# Altium PCB KUOZHAN.PCBDOC (part 8 of 21)
Units mm, origin at the board's own origin, x right, y up, seen from the top; angles counter-clockwise.
Board outline 165.51 x 116.38 mm, 2 copper layers (Top Layer, Bottom Layer); 171 components, 245 nets, 894 pads, 298 vias.
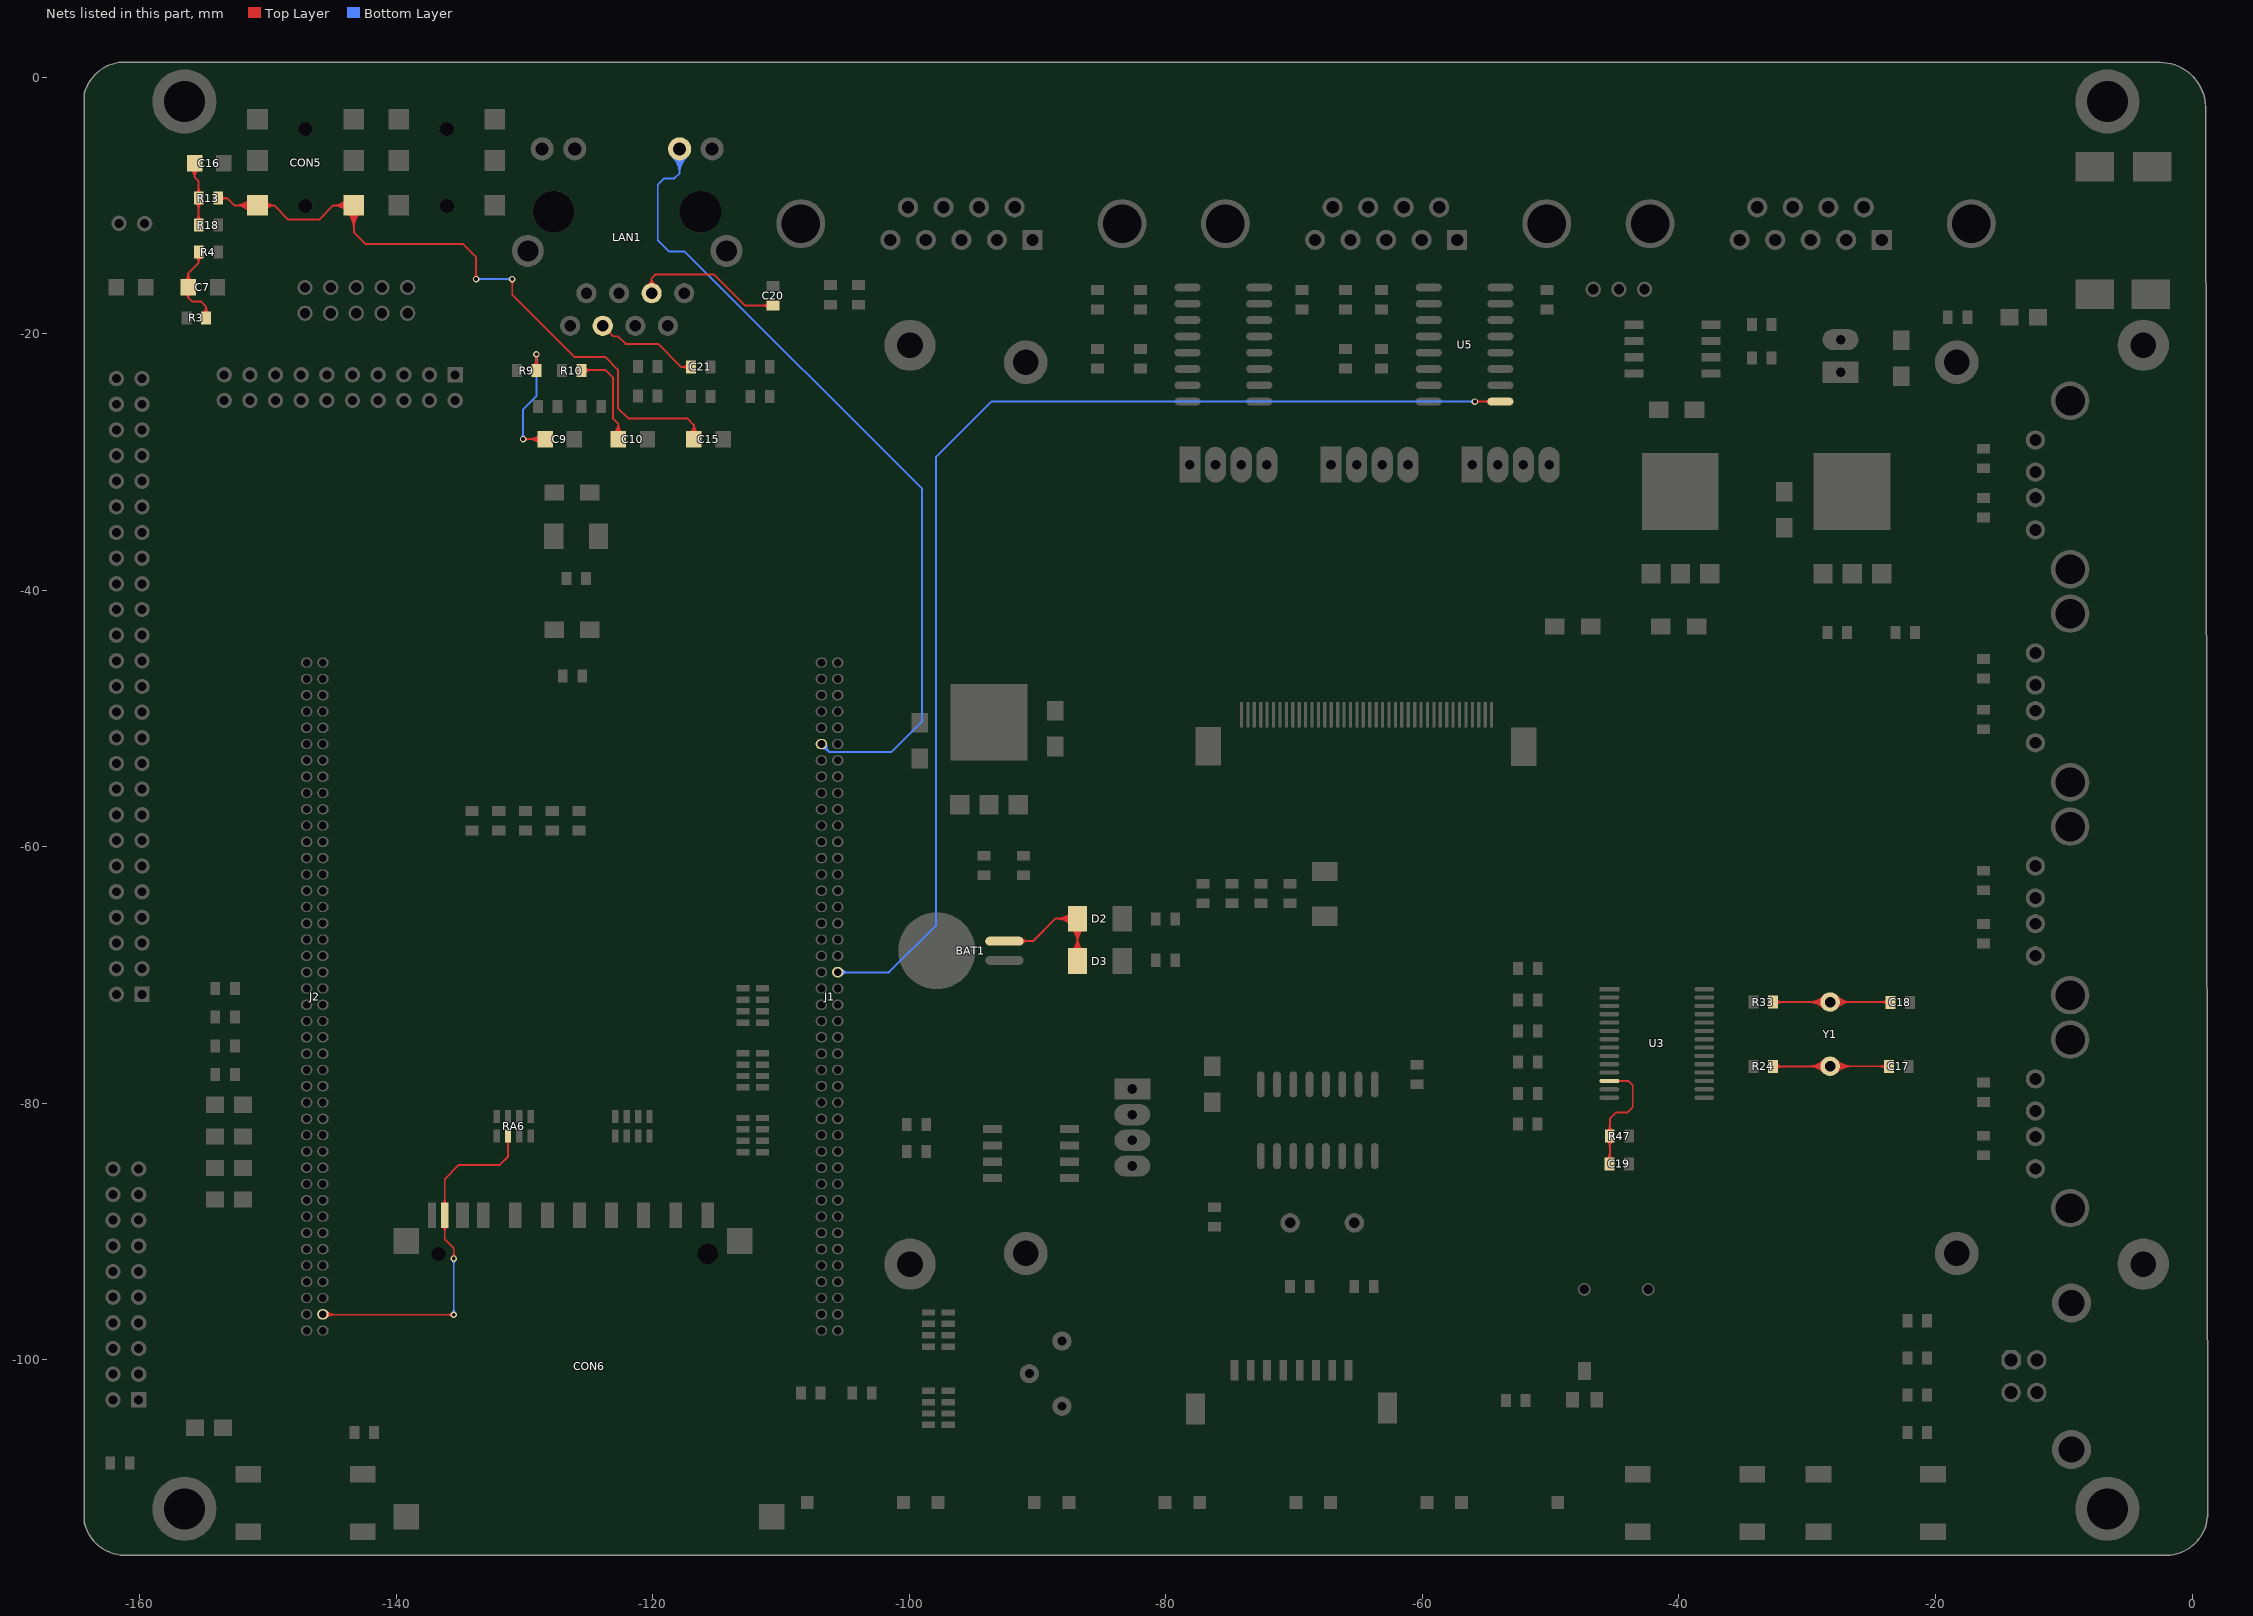
[diagram p8: the nets of this part, all layers, seen from the top]

## Via types
v1: diameter 0.5, hole 0.3, Top Layer to Bottom Layer, 272 vias
v2: diameter 0.6, hole 0.3, Top Layer to Bottom Layer, 24 vias
v3: diameter 0.9, hole 0.9, Top Layer to Bottom Layer, 2 vias

## Nets (pads, with @x,y where several pads share a name; then routed paths per layer and width w, separated by ;. In a path a pad name is that pad's centre, name@x,y a point inside that pad or via, vN(x,y) a via of type N, cw(c..) or ccw(c..) an arc to the next point about the centre after c; other vN are vias at no path point) (continued)
MIC_IN: C15.2 CON5.5 CON5.6 R13.2 | length 103.3
  Top Layer w0.15: R13.2@-153.863,-9.44 -153.16,-9.44 ; CON5.5@-151.313,-10.513 ccw(c-152.55,-11.75) -152.55,-10 ccw(c-152.55,-8.25) CON5.5@-151.313,-9.487 ; CON5.5@-151.207,-10.407 ccw(c-152.188,-11.388) -152.188,-10 ccw(c-152.188,-8.612) CON5.5@-151.207,-9.593 ; CON5.5@-151.101,-10.301 ccw(c-151.826,-11.026) -151.826,-10 ccw(c-151.826,-8.974) CON5.5@-151.101,-9.699 ; CON5.5@-150.311,-10.302 cw(c-149.769,-10.637) -149.769,-10 cw(c-149.769,-9.363) CON5.5@-150.311,-9.698 ; CON5.5@-150.183,-10.381 cw(c-149.5,-10.803) -149.5,-10 ; CON5.5@-150.183,-9.619 ccw(c-149.5,-9.197) -149.5,-10 ; CON5.6@-143.835,-10.48 ccw(c-144.9,-11.421) -144.9,-10 ; CON5.6@-143.835,-9.52 cw(c-144.9,-8.579) -144.9,-10 ; CON5.6@-143.805,-10.513 cw(c-145.042,-11.75) -143.292,-11.75 cw(c-141.542,-11.75) CON5.6@-142.779,-10.513 ; CON5.6@-143.723,-10.381 ccw(c-144.567,-11.127) -144.567,-10 ccw(c-144.567,-8.873) CON5.6@-143.723,-9.619 ; CON5.6@-143.699,-10.407 cw(c-144.68,-11.388) -143.292,-11.388 cw(c-141.904,-11.388) CON5.6@-142.885,-10.407 ; CON5.6@-143.611,-10.281 ccw(c-144.235,-10.833) -144.235,-10 ccw(c-144.235,-9.167) CON5.6@-143.611,-9.719 ; CON5.6@-143.593,-10.301 cw(c-144.318,-11.026) -143.292,-11.026 cw(c-142.266,-11.026) CON5.6@-142.991,-10.301 ; v1@-133.848,-15.652 ccw(c-134.061,-15.439) -133.76,-15.439 ccw(c-133.458,-15.439) v1@-133.671,-15.652 ; v1(-133.76,-15.74) -133.76,-14.04 -134.8,-13 -142.4,-13 -143.292,-12.108 CON5.6@-143.292,-10 -144.9,-10 ; v1@-131.029,-15.829 cw(c-131.242,-16.042) -130.94,-16.042 cw(c-130.639,-16.042) v1@-130.852,-15.829 ; v1(-130.94,-15.74) -130.94,-16.96 -126.1,-21.8 -123.7,-21.8 -122.7,-22.8 -122.7,-25.8 -121.9,-26.6 -117.3,-26.6 -116.782,-27.117 ; C15.2@-116.782,-28.219 -116.782,-27.117 ; R13.2@-153.64,-9.649 cw(c-153.16,-10.097) -153.16,-9.44 ; R13.2@-153.64,-9.649 cw(c-153.16,-10.097) -153.16,-9.44 ; R13.2@-153.64,-9.649 cw(c-153.16,-10.097) -153.16,-9.44 ; R13.2@-153.64,-9.649 cw(c-153.16,-10.097) -153.16,-9.44 ; R13.2@-153.64,-9.649 cw(c-153.16,-10.097) -153.16,-9.44 ; R13.2@-153.64,-9.232 ccw(c-153.16,-8.784) -153.16,-9.44 ; R13.2@-153.64,-9.232 ccw(c-153.16,-8.784) -153.16,-9.44 ; R13.2@-153.64,-9.232 ccw(c-153.16,-8.784) -153.16,-9.44 ; R13.2@-153.64,-9.232 ccw(c-153.16,-8.784) -153.16,-9.44 ; R13.2@-153.64,-9.232 ccw(c-153.16,-8.784) -153.16,-9.44 ; -153.16,-9.44 -152.6,-10 CON5.5@-150.8,-10 -149.5,-10 ; -149.5,-10 -148.4,-11.1 -146,-11.1 -144.9,-10 ; v1@-133.883,-15.617 ccw(c-134.182,-15.318) -133.76,-15.318 ; v1@-133.883,-15.617 ccw(c-134.182,-15.318) -133.76,-15.318 ; v1@-133.883,-15.617 ccw(c-134.182,-15.318) -133.76,-15.318 ; v1@-133.883,-15.617 ccw(c-134.182,-15.318) -133.76,-15.318 ; -133.76,-15.318 ccw(c-133.337,-15.318) v1@-133.636,-15.617 ; -133.76,-15.318 ccw(c-133.337,-15.318) v1@-133.636,-15.617 ; -133.76,-15.318 ccw(c-133.337,-15.318) v1@-133.636,-15.617 ; -133.76,-15.318 ccw(c-133.337,-15.318) v1@-133.636,-15.617 ; v1@-131.064,-15.864 cw(c-131.363,-16.163) -130.94,-16.163 ; v1@-131.064,-15.864 cw(c-131.363,-16.163) -130.94,-16.163 ; v1@-131.064,-15.864 cw(c-131.363,-16.163) -130.94,-16.163 ; v1@-131.064,-15.864 cw(c-131.363,-16.163) -130.94,-16.163 ; -130.94,-16.163 cw(c-130.518,-16.163) v1@-130.817,-15.864 ; -130.94,-16.163 cw(c-130.518,-16.163) v1@-130.817,-15.864 ; -130.94,-16.163 cw(c-130.518,-16.163) v1@-130.817,-15.864 ; -130.94,-16.163 cw(c-130.518,-16.163) v1@-130.817,-15.864 ; C15.2@-117.098,-27.749 ccw(c-117.572,-27.118) -116.782,-27.118 ; C15.2@-117.098,-27.749 ccw(c-117.572,-27.118) -116.782,-27.118 ; C15.2@-117.098,-27.749 ccw(c-117.572,-27.118) -116.782,-27.118 ; C15.2@-117.098,-27.749 ccw(c-117.572,-27.118) -116.782,-27.118 ; C15.2@-117.098,-27.749 ccw(c-117.572,-27.118) -116.782,-27.118 ; C15.2@-117.008,-27.869 ccw(c-117.347,-27.418) -116.782,-27.418 ; C15.2@-117.008,-27.869 ccw(c-117.347,-27.418) -116.782,-27.418 ; C15.2@-117.008,-27.869 ccw(c-117.347,-27.418) -116.782,-27.418 ; C15.2@-117.008,-27.869 ccw(c-117.347,-27.418) -116.782,-27.418 ; C15.2@-117.008,-27.869 ccw(c-117.347,-27.418) -116.782,-27.418 ; -116.782,-27.418 ccw(c-116.218,-27.418) C15.2@-116.557,-27.869 ; -116.782,-27.418 ccw(c-116.218,-27.418) C15.2@-116.557,-27.869 ; -116.782,-27.418 ccw(c-116.218,-27.418) C15.2@-116.557,-27.869 ; -116.782,-27.418 ccw(c-116.218,-27.418) C15.2@-116.557,-27.869 ; -116.782,-27.418 ccw(c-116.218,-27.418) C15.2@-116.557,-27.869 ; -116.782,-27.118 ccw(c-115.993,-27.118) C15.2@-116.467,-27.749 ; -116.782,-27.118 ccw(c-115.993,-27.118) C15.2@-116.467,-27.749 ; -116.782,-27.118 ccw(c-115.993,-27.118) C15.2@-116.467,-27.749 ; -116.782,-27.118 ccw(c-115.993,-27.118) C15.2@-116.467,-27.749 ; -116.782,-27.118 ccw(c-115.993,-27.118) C15.2@-116.467,-27.749
  Bottom Layer w0.15: v1(-133.76,-15.74) v1(-130.94,-15.74) ; v1@-133.671,-15.829 cw(c-133.458,-16.042) -133.458,-15.74 cw(c-133.458,-15.439) v1@-133.671,-15.652 ; v1@-131.029,-15.829 ccw(c-131.242,-16.042) -131.242,-15.74 ccw(c-131.242,-15.439) v1@-131.029,-15.652 ; v1@-133.636,-15.864 cw(c-133.337,-16.163) -133.337,-15.74 ; v1@-133.636,-15.864 cw(c-133.337,-16.163) -133.337,-15.74 ; v1@-133.636,-15.864 cw(c-133.337,-16.163) -133.337,-15.74 ; v1@-133.636,-15.864 cw(c-133.337,-16.163) -133.337,-15.74 ; v1@-133.636,-15.617 ccw(c-133.337,-15.318) -133.337,-15.74 ; v1@-133.636,-15.617 ccw(c-133.337,-15.318) -133.337,-15.74 ; v1@-133.636,-15.617 ccw(c-133.337,-15.318) -133.337,-15.74 ; v1@-133.636,-15.617 ccw(c-133.337,-15.318) -133.337,-15.74 ; -131.363,-15.74 cw(c-131.363,-16.163) v1@-131.064,-15.864 ; -131.363,-15.74 ccw(c-131.363,-15.318) v1@-131.064,-15.617 ; -131.363,-15.74 cw(c-131.363,-16.163) v1@-131.064,-15.864 ; -131.363,-15.74 ccw(c-131.363,-15.318) v1@-131.064,-15.617 ; -131.363,-15.74 cw(c-131.363,-16.163) v1@-131.064,-15.864 ; -131.363,-15.74 ccw(c-131.363,-15.318) v1@-131.064,-15.617 ; -131.363,-15.74 ccw(c-131.363,-15.318) v1@-131.064,-15.617 ; -131.363,-15.74 cw(c-131.363,-16.163) v1@-131.064,-15.864
NCD_SD: CON6.11 J2.82 RA6.6 | length 61.7
  Top Layer w0.15: J2.82@-145.703,-96.474 v1(-135.5,-96.474) ; v1@-135.588,-96.562 ccw(c-135.802,-96.775) -135.802,-96.474 ccw(c-135.802,-96.172) v1@-135.588,-96.385 ; v1@-135.588,-92.012 ccw(c-135.802,-91.798) -135.5,-91.798 ccw(c-135.198,-91.798) v1@-135.412,-92.012 ; v1(-135.5,-92.1) -135.5,-91.3 -136.203,-90.597 CON6.11@-136.203,-88.729 -136.203,-85.903 -135.1,-84.8 -131.9,-84.8 -131.274,-84.174 RA6.6@-131.274,-82.544 ; J2.82@-145.579,-96.597 cw(c-145.28,-96.896) J2.82@-145.28,-96.474 ; J2.82@-145.579,-96.597 cw(c-145.28,-96.896) J2.82@-145.28,-96.474 ; J2.82@-145.579,-96.597 cw(c-145.28,-96.896) J2.82@-145.28,-96.474 ; J2.82@-145.579,-96.35 ccw(c-145.28,-96.051) J2.82@-145.28,-96.474 ; J2.82@-145.579,-96.35 ccw(c-145.28,-96.051) J2.82@-145.28,-96.474 ; J2.82@-145.579,-96.35 ccw(c-145.28,-96.051) J2.82@-145.28,-96.474 ; J2.82@-145.473,-96.703 cw(c-144.918,-97.258) -144.918,-96.474 ; J2.82@-145.473,-96.703 cw(c-144.918,-97.258) -144.918,-96.474 ; J2.82@-145.473,-96.703 cw(c-144.918,-97.258) -144.918,-96.474 ; J2.82@-145.473,-96.244 ccw(c-144.918,-95.689) -144.918,-96.474 ; J2.82@-145.473,-96.244 ccw(c-144.918,-95.689) -144.918,-96.474 ; J2.82@-145.473,-96.244 ccw(c-144.918,-95.689) -144.918,-96.474 ; CON6.11@-136.362,-89.588 cw(c-136.746,-89.972) -136.203,-89.972 ; CON6.11@-136.362,-89.588 cw(c-136.746,-89.972) -136.203,-89.972 ; CON6.11@-136.362,-89.588 cw(c-136.746,-89.972) -136.203,-89.972 ; CON6.11@-136.362,-89.588 cw(c-136.746,-89.972) -136.203,-89.972 ; CON6.11@-136.362,-89.588 cw(c-136.746,-89.972) -136.203,-89.972 ; CON6.11@-136.362,-87.87 ccw(c-136.746,-87.485) -136.203,-87.485 ; CON6.11@-136.362,-87.87 ccw(c-136.746,-87.485) -136.203,-87.485 ; CON6.11@-136.362,-87.87 ccw(c-136.746,-87.485) -136.203,-87.485 ; CON6.11@-136.362,-87.87 ccw(c-136.746,-87.485) -136.203,-87.485 ; CON6.11@-136.362,-87.87 ccw(c-136.746,-87.485) -136.203,-87.485 ; -136.203,-89.972 cw(c-135.66,-89.972) CON6.11@-136.044,-89.588 ; -136.203,-89.972 cw(c-135.66,-89.972) CON6.11@-136.044,-89.588 ; -136.203,-89.972 cw(c-135.66,-89.972) CON6.11@-136.044,-89.588 ; -136.203,-89.972 cw(c-135.66,-89.972) CON6.11@-136.044,-89.588 ; -136.203,-89.972 cw(c-135.66,-89.972) CON6.11@-136.044,-89.588 ; -136.203,-87.485 ccw(c-135.66,-87.485) CON6.11@-136.044,-87.87 ; -136.203,-87.485 ccw(c-135.66,-87.485) CON6.11@-136.044,-87.87 ; -136.203,-87.485 ccw(c-135.66,-87.485) CON6.11@-136.044,-87.87 ; -136.203,-87.485 ccw(c-135.66,-87.485) CON6.11@-136.044,-87.87 ; -136.203,-87.485 ccw(c-135.66,-87.485) CON6.11@-136.044,-87.87 ; -135.922,-96.474 cw(c-135.922,-96.896) v1@-135.624,-96.597 ; -135.922,-96.474 ccw(c-135.922,-96.051) v1@-135.624,-96.35 ; -135.922,-96.474 cw(c-135.922,-96.896) v1@-135.624,-96.597 ; -135.922,-96.474 ccw(c-135.922,-96.051) v1@-135.624,-96.35 ; -135.922,-96.474 cw(c-135.922,-96.896) v1@-135.624,-96.597 ; -135.922,-96.474 ccw(c-135.922,-96.051) v1@-135.624,-96.35 ; -135.922,-96.474 ccw(c-135.922,-96.051) v1@-135.624,-96.35 ; -135.922,-96.474 cw(c-135.922,-96.896) v1@-135.624,-96.597 ; v1@-135.624,-91.976 ccw(c-135.922,-91.678) -135.5,-91.678 ; v1@-135.624,-91.976 ccw(c-135.922,-91.678) -135.5,-91.678 ; v1@-135.624,-91.976 ccw(c-135.922,-91.678) -135.5,-91.678 ; v1@-135.624,-91.976 ccw(c-135.922,-91.678) -135.5,-91.678 ; -135.5,-91.678 ccw(c-135.078,-91.678) v1@-135.376,-91.976 ; -135.5,-91.678 ccw(c-135.078,-91.678) v1@-135.376,-91.976 ; -135.5,-91.678 ccw(c-135.078,-91.678) v1@-135.376,-91.976 ; -135.5,-91.678 ccw(c-135.078,-91.678) v1@-135.376,-91.976 ; RA6.6@-131.398,-82.925 cw(c-131.697,-83.224) -131.274,-83.224 ; RA6.6@-131.398,-82.925 cw(c-131.697,-83.224) -131.274,-83.224 ; RA6.6@-131.398,-82.925 cw(c-131.697,-83.224) -131.274,-83.224 ; RA6.6@-131.398,-82.925 cw(c-131.697,-83.224) -131.274,-83.224 ; RA6.6@-131.398,-82.925 cw(c-131.697,-83.224) -131.274,-83.224 ; -131.274,-83.224 cw(c-130.852,-83.224) RA6.6@-131.15,-82.925 ; -131.274,-83.224 cw(c-130.852,-83.224) RA6.6@-131.15,-82.925 ; -131.274,-83.224 cw(c-130.852,-83.224) RA6.6@-131.15,-82.925 ; -131.274,-83.224 cw(c-130.852,-83.224) RA6.6@-131.15,-82.925 ; -131.274,-83.224 cw(c-130.852,-83.224) RA6.6@-131.15,-82.925 ; J2.82@-145.529,-96.316 ccw(c-145.148,-95.934) -145.148,-96.474 cw(c-145.148,-95.934) J2.82@-145.529,-96.316 ; J2.82@-145.423,-96.669 cw(c-144.951,-97.141) -144.951,-96.474 ccw(c-144.951,-97.141) J2.82@-145.423,-96.669 ; J2.82@-145.423,-96.209 ccw(c-144.785,-95.572) -144.785,-96.474 cw(c-144.785,-95.572) J2.82@-145.423,-96.209
  Bottom Layer w0.15: v1@-135.588,-96.385 ccw(c-135.802,-96.172) -135.5,-96.172 ccw(c-135.198,-96.172) v1@-135.412,-96.385 ; v1@-135.588,-92.188 cw(c-135.802,-92.402) -135.5,-92.402 cw(c-135.198,-92.402) v1@-135.412,-92.188 ; v1(-135.5,-96.474) v1(-135.5,-92.1) ; v1@-135.624,-96.35 ccw(c-135.922,-96.051) -135.5,-96.051 ; v1@-135.624,-96.35 ccw(c-135.922,-96.051) -135.5,-96.051 ; v1@-135.624,-96.35 ccw(c-135.922,-96.051) -135.5,-96.051 ; v1@-135.624,-96.35 ccw(c-135.922,-96.051) -135.5,-96.051 ; v1@-135.624,-92.224 cw(c-135.922,-92.522) -135.5,-92.522 ; v1@-135.624,-92.224 cw(c-135.922,-92.522) -135.5,-92.522 ; v1@-135.624,-92.224 cw(c-135.922,-92.522) -135.5,-92.522 ; v1@-135.624,-92.224 cw(c-135.922,-92.522) -135.5,-92.522 ; -135.5,-96.051 ccw(c-135.078,-96.051) v1@-135.376,-96.35 ; -135.5,-96.051 ccw(c-135.078,-96.051) v1@-135.376,-96.35 ; -135.5,-96.051 ccw(c-135.078,-96.051) v1@-135.376,-96.35 ; -135.5,-96.051 ccw(c-135.078,-96.051) v1@-135.376,-96.35 ; -135.5,-92.522 cw(c-135.078,-92.522) v1@-135.376,-92.224 ; -135.5,-92.522 cw(c-135.078,-92.522) v1@-135.376,-92.224 ; -135.5,-92.522 cw(c-135.078,-92.522) v1@-135.376,-92.224 ; -135.5,-92.522 cw(c-135.078,-92.522) v1@-135.376,-92.224
NCTS0: J1.40 U5.9 | length 111.1
  Top Layer w0.15: v1(-55.9,-25.29) U5.9@-53.812,-25.29 ; v1@-55.812,-25.378 cw(c-55.598,-25.592) -55.598,-25.29 cw(c-55.598,-24.988) v1@-55.812,-25.202 ; v1@-55.776,-25.414 cw(c-55.478,-25.712) -55.478,-25.29 ; v1@-55.776,-25.414 cw(c-55.478,-25.712) -55.478,-25.29 ; v1@-55.776,-25.414 cw(c-55.478,-25.712) -55.478,-25.29 ; v1@-55.776,-25.414 cw(c-55.478,-25.712) -55.478,-25.29 ; v1@-55.776,-25.166 ccw(c-55.478,-24.868) -55.478,-25.29 ; v1@-55.776,-25.166 ccw(c-55.478,-24.868) -55.478,-25.29 ; v1@-55.776,-25.166 ccw(c-55.478,-24.868) -55.478,-25.29 ; v1@-55.776,-25.166 ccw(c-55.478,-24.868) -55.478,-25.29 ; -55.178,-25.29 cw(c-55.178,-25.845) U5.9@-54.786,-25.452 ; -55.178,-25.29 ccw(c-55.178,-24.735) U5.9@-54.786,-25.128 ; -55.178,-25.29 cw(c-55.178,-25.845) U5.9@-54.786,-25.452 ; -55.178,-25.29 ccw(c-55.178,-24.735) U5.9@-54.786,-25.128 ; -55.178,-25.29 cw(c-55.178,-25.845) U5.9@-54.786,-25.452 ; -55.178,-25.29 ccw(c-55.178,-24.735) U5.9@-54.786,-25.128 ; -55.178,-25.29 cw(c-55.178,-25.845) U5.9@-54.786,-25.452 ; -55.178,-25.29 ccw(c-55.178,-24.735) U5.9@-54.786,-25.128 ; -55.178,-25.29 ccw(c-55.178,-24.735) U5.9@-54.786,-25.128 ; -55.178,-25.29 cw(c-55.178,-25.845) U5.9@-54.786,-25.452
  Bottom Layer w0.15: J1.40@-105.571,-69.785 -101.585,-69.785 -97.9,-66.1 -97.9,-29.6 -93.59,-25.29 v1(-55.9,-25.29) ; v1@-55.988,-25.378 ccw(c-56.202,-25.592) -56.202,-25.29 ccw(c-56.202,-24.988) v1@-55.988,-25.202 ; J1.40@-105.447,-69.909 cw(c-105.148,-70.208) J1.40@-105.148,-69.785 ; J1.40@-105.447,-69.909 cw(c-105.148,-70.208) J1.40@-105.148,-69.785 ; J1.40@-105.447,-69.909 cw(c-105.148,-70.208) J1.40@-105.148,-69.785 ; J1.40@-105.447,-69.661 ccw(c-105.148,-69.363) J1.40@-105.148,-69.785 ; J1.40@-105.447,-69.661 ccw(c-105.148,-69.363) J1.40@-105.148,-69.785 ; J1.40@-105.447,-69.661 ccw(c-105.148,-69.363) J1.40@-105.148,-69.785 ; J1.40@-105.341,-70.015 cw(c-104.786,-70.57) -104.786,-69.785 ; J1.40@-105.341,-70.015 cw(c-104.786,-70.57) -104.786,-69.785 ; J1.40@-105.341,-70.015 cw(c-104.786,-70.57) -104.786,-69.785 ; J1.40@-105.341,-69.555 ccw(c-104.786,-69) -104.786,-69.785 ; J1.40@-105.341,-69.555 ccw(c-104.786,-69) -104.786,-69.785 ; J1.40@-105.341,-69.555 ccw(c-104.786,-69) -104.786,-69.785 ; -56.322,-25.29 cw(c-56.322,-25.712) v1@-56.024,-25.414 ; -56.322,-25.29 ccw(c-56.322,-24.868) v1@-56.024,-25.166 ; -56.322,-25.29 cw(c-56.322,-25.712) v1@-56.024,-25.414 ; -56.322,-25.29 ccw(c-56.322,-24.868) v1@-56.024,-25.166 ; -56.322,-25.29 cw(c-56.322,-25.712) v1@-56.024,-25.414 ; -56.322,-25.29 ccw(c-56.322,-24.868) v1@-56.024,-25.166 ; -56.322,-25.29 ccw(c-56.322,-24.868) v1@-56.024,-25.166 ; -56.322,-25.29 cw(c-56.322,-25.712) v1@-56.024,-25.414 ; J1.40@-105.397,-69.646 ccw(c-105.06,-69.309) -105.06,-69.785 cw(c-105.06,-69.309) J1.40@-105.397,-69.646 ; J1.40@-105.291,-69.999 cw(c-104.774,-70.516) -104.774,-69.785 ccw(c-104.774,-70.516) J1.40@-105.291,-69.999 ; J1.40@-105.291,-69.54 ccw(c-104.698,-68.947) -104.698,-69.785 cw(c-104.698,-68.947) J1.40@-105.291,-69.54
NETACT: J1.11 LAN1.10 | length 108.7
  Bottom Layer w0.15: LAN1.10@-117.898,-5.594 -117.898,-7.498 ; J1.11@-106.841,-51.993 -106.216,-52.618 -101.418,-52.618 -99,-50.2 -99,-32.1 -117.5,-13.6 -118.7,-13.6 -119.6,-12.7 -119.6,-8.4 -119.1,-7.9 -118.3,-7.9 -117.898,-7.498 ; LAN1.10@-118.462,-6.196 cw(c-119.683,-7.498) -117.898,-7.498 ; LAN1.10@-118.462,-6.196 cw(c-119.683,-7.498) -117.898,-7.498 ; LAN1.10@-118.462,-6.196 cw(c-119.683,-7.498) -117.898,-7.498 ; LAN1.10@-118.462,-6.196 cw(c-119.683,-7.498) -117.898,-7.498 ; LAN1.10@-118.462,-6.196 cw(c-119.683,-7.498) -117.898,-7.498 ; LAN1.10@-118.36,-6.086 cw(c-119.358,-7.152) -117.898,-7.152 ; LAN1.10@-118.36,-6.086 cw(c-119.358,-7.152) -117.898,-7.152 ; LAN1.10@-118.36,-6.086 cw(c-119.358,-7.152) -117.898,-7.152 ; LAN1.10@-118.36,-6.086 cw(c-119.358,-7.152) -117.898,-7.152 ; LAN1.10@-118.36,-6.086 cw(c-119.358,-7.152) -117.898,-7.152 ; LAN1.10@-118.257,-5.977 cw(c-119.034,-6.806) -117.898,-6.806 ; LAN1.10@-118.257,-5.977 cw(c-119.034,-6.806) -117.898,-6.806 ; LAN1.10@-118.257,-5.977 cw(c-119.034,-6.806) -117.898,-6.806 ; LAN1.10@-118.257,-5.977 cw(c-119.034,-6.806) -117.898,-6.806 ; LAN1.10@-118.257,-5.977 cw(c-119.034,-6.806) -117.898,-6.806 ; -117.898,-7.498 cw(c-116.113,-7.498) LAN1.10@-117.334,-6.196 ; -117.898,-7.498 cw(c-116.113,-7.498) LAN1.10@-117.334,-6.196 ; -117.898,-7.498 cw(c-116.113,-7.498) LAN1.10@-117.334,-6.196 ; -117.898,-7.498 cw(c-116.113,-7.498) LAN1.10@-117.334,-6.196 ; -117.898,-7.498 cw(c-116.113,-7.498) LAN1.10@-117.334,-6.196 ; -117.898,-7.152 cw(c-116.438,-7.152) LAN1.10@-117.436,-6.086 ; -117.898,-7.152 cw(c-116.438,-7.152) LAN1.10@-117.436,-6.086 ; -117.898,-7.152 cw(c-116.438,-7.152) LAN1.10@-117.436,-6.086 ; -117.898,-7.152 cw(c-116.438,-7.152) LAN1.10@-117.436,-6.086 ; -117.898,-7.152 cw(c-116.438,-7.152) LAN1.10@-117.436,-6.086 ; -117.898,-6.806 cw(c-116.762,-6.806) LAN1.10@-117.539,-5.977 ; -117.898,-6.806 cw(c-116.762,-6.806) LAN1.10@-117.539,-5.977 ; -117.898,-6.806 cw(c-116.762,-6.806) LAN1.10@-117.539,-5.977 ; -117.898,-6.806 cw(c-116.762,-6.806) LAN1.10@-117.539,-5.977 ; -117.898,-6.806 cw(c-116.762,-6.806) LAN1.10@-117.539,-5.977 ; J1.11@-106.841,-52.318 cw(c-106.841,-53.102) -106.286,-52.548 ; J1.11@-106.841,-52.318 cw(c-106.841,-53.102) -106.286,-52.548 ; J1.11@-106.841,-52.318 cw(c-106.841,-53.102) -106.286,-52.548 ; J1.11@-106.841,-52.168 cw(c-106.841,-52.59) J1.11@-106.542,-52.292 ; J1.11@-106.841,-52.168 cw(c-106.841,-52.59) J1.11@-106.542,-52.292 ; J1.11@-106.841,-52.168 cw(c-106.841,-52.59) J1.11@-106.542,-52.292 ; J1.11@-106.666,-51.993 ccw(c-106.243,-51.993) J1.11@-106.542,-52.292 ; J1.11@-106.666,-51.993 ccw(c-106.243,-51.993) J1.11@-106.542,-52.292 ; J1.11@-106.666,-51.993 ccw(c-106.243,-51.993) J1.11@-106.542,-52.292 ; J1.11@-106.516,-51.993 ccw(c-105.731,-51.993) -106.286,-52.548 ; J1.11@-106.516,-51.993 ccw(c-105.731,-51.993) -106.286,-52.548 ; J1.11@-106.516,-51.993 ccw(c-105.731,-51.993) -106.286,-52.548 ; J1.11@-106.791,-52.314 cw(c-106.791,-52.97) -106.327,-52.506 ccw(c-106.791,-52.97) J1.11@-106.791,-52.314 ; J1.11@-106.616,-51.999 ccw(c-106.151,-52.024) -106.48,-52.353 cw(c-106.151,-52.024) J1.11@-106.616,-51.999 ; J1.11@-106.466,-52.007 ccw(c-105.7,-52.048) -106.243,-52.591 cw(c-105.7,-52.048) J1.11@-106.466,-52.007
NetBAT1_1: BAT1.1 D2.2 D3.1 | length 28.7
  Top Layer w0.15: BAT1.1@-92.577,-67.35 -90.35,-67.35 -88.601,-65.601 D2.2@-86.885,-65.601 D3.1@-86.885,-68.899 ; BAT1.1@-91.233,-67.544 cw(c-90.763,-68.014) -90.763,-67.35 cw(c-90.763,-66.686) BAT1.1@-91.233,-67.156 ; D3.1@-87.363,-68.172 ccw(c-88.515,-67.02) -86.885,-67.02 ccw(c-85.256,-67.02) D3.1@-86.408,-68.172 ; D2.2@-87.363,-66.328 cw(c-88.515,-67.48) -86.885,-67.48 cw(c-85.256,-67.48) D2.2@-86.408,-66.328 ; D2.2@-87.363,-66.078 ccw(c-88.515,-67.23) -88.515,-65.601 ccw(c-88.515,-63.971) D2.2@-87.363,-65.123 ; D3.1@-87.257,-68.278 ccw(c-88.153,-67.382) -86.885,-67.382 ccw(c-85.618,-67.382) D3.1@-86.514,-68.278 ; D2.2@-87.257,-66.222 cw(c-88.153,-67.118) -86.885,-67.118 cw(c-85.618,-67.118) D2.2@-86.514,-66.222 ; D2.2@-87.257,-65.972 ccw(c-88.153,-66.868) -88.153,-65.601 ccw(c-88.153,-64.333) D2.2@-87.257,-65.229 ; D3.1@-87.151,-68.384 ccw(c-87.791,-67.744) -86.885,-67.744 ccw(c-85.98,-67.744) D3.1@-86.62,-68.384 ; D2.2@-87.151,-66.116 cw(c-87.791,-66.756) -86.885,-66.756 cw(c-85.98,-66.756) D2.2@-86.62,-66.116 ; D2.2@-87.151,-65.866 ccw(c-87.791,-66.506) -87.791,-65.601 ccw(c-87.791,-64.695) D2.2@-87.151,-65.335
NetC7_1: C7.1 R3.1 R4.1 | length 33.4
  Top Layer w0.15: R4.1@-155.387,-13.64 -155.387,-14.487 ; R3.1@-154.813,-18.76 -154.813,-17.887 -155.2,-17.5 -155.9,-17.5 -156.204,-17.197 ; C7.1@-156.511,-15.906 ccw(c-156.947,-15.304) -156.204,-15.304 ; C7.1@-156.511,-15.906 ccw(c-156.947,-15.304) -156.204,-15.304 ; C7.1@-156.511,-15.906 ccw(c-156.947,-15.304) -156.204,-15.304 ; C7.1@-156.511,-15.906 ccw(c-156.947,-15.304) -156.204,-15.304 ; C7.1@-156.511,-15.906 ccw(c-156.947,-15.304) -156.204,-15.304 ; C7.1@-156.423,-16.028 ccw(c-156.735,-15.597) -156.204,-15.597 ; C7.1@-156.423,-16.028 ccw(c-156.735,-15.597) -156.204,-15.597 ; C7.1@-156.423,-16.028 ccw(c-156.735,-15.597) -156.204,-15.597 ; C7.1@-156.423,-16.028 ccw(c-156.735,-15.597) -156.204,-15.597 ; C7.1@-156.423,-16.028 ccw(c-156.735,-15.597) -156.204,-15.597 ; C7.1@-156.392,-16.921 cw(c-156.499,-17.196) -156.204,-17.196 ; C7.1@-156.392,-16.921 cw(c-156.499,-17.196) -156.204,-17.196 ; C7.1@-156.392,-16.921 cw(c-156.499,-17.196) -156.204,-17.196 ; C7.1@-156.392,-16.921 cw(c-156.499,-17.196) -156.204,-17.196 ; C7.1@-156.392,-16.921 cw(c-156.499,-17.196) -156.204,-17.196 ; -156.204,-17.196 cw(c-155.908,-17.196) C7.1@-156.015,-16.921 ; -156.204,-17.196 cw(c-155.908,-17.196) C7.1@-156.015,-16.921 ; -156.204,-17.196 cw(c-155.908,-17.196) C7.1@-156.015,-16.921 ; -156.204,-17.196 cw(c-155.908,-17.196) C7.1@-156.015,-16.921 ; -156.204,-17.196 cw(c-155.908,-17.196) C7.1@-156.015,-16.921 ; -156.204,-17.197 C7.1@-156.204,-16.381 -156.204,-15.303 ; -156.204,-15.597 ccw(c-155.672,-15.597) C7.1@-155.984,-16.028 ; -156.204,-15.597 ccw(c-155.672,-15.597) C7.1@-155.984,-16.028 ; -156.204,-15.597 ccw(c-155.672,-15.597) C7.1@-155.984,-16.028 ; -156.204,-15.597 ccw(c-155.672,-15.597) C7.1@-155.984,-16.028 ; -156.204,-15.597 ccw(c-155.672,-15.597) C7.1@-155.984,-16.028 ; -156.204,-15.304 ccw(c-155.46,-15.304) C7.1@-155.896,-15.906 ; -156.204,-15.304 ccw(c-155.46,-15.304) C7.1@-155.896,-15.906 ; -156.204,-15.304 ccw(c-155.46,-15.304) C7.1@-155.896,-15.906 ; -156.204,-15.304 ccw(c-155.46,-15.304) C7.1@-155.896,-15.906 ; -156.204,-15.304 ccw(c-155.46,-15.304) C7.1@-155.896,-15.906 ; -156.204,-15.303 -155.387,-14.487 ; R4.1@-155.6,-13.988 cw(c-156.081,-14.487) -155.387,-14.487 ; R4.1@-155.6,-13.988 cw(c-156.081,-14.487) -155.387,-14.487 ; R4.1@-155.6,-13.988 cw(c-156.081,-14.487) -155.387,-14.487 ; R4.1@-155.6,-13.988 cw(c-156.081,-14.487) -155.387,-14.487 ; R4.1@-155.6,-13.988 cw(c-156.081,-14.487) -155.387,-14.487 ; -155.387,-14.487 cw(c-154.693,-14.487) R4.1@-155.175,-13.988 ; -155.387,-14.487 cw(c-154.693,-14.487) R4.1@-155.175,-13.988 ; -155.387,-14.487 cw(c-154.693,-14.487) R4.1@-155.175,-13.988 ; -155.387,-14.487 cw(c-154.693,-14.487) R4.1@-155.175,-13.988 ; -155.387,-14.487 cw(c-154.693,-14.487) R4.1@-155.175,-13.988 ; R3.1@-155.029,-18.416 ccw(c-155.551,-17.894) -154.813,-17.894 ; R3.1@-155.029,-18.416 ccw(c-155.551,-17.894) -154.813,-17.894 ; R3.1@-155.029,-18.416 ccw(c-155.551,-17.894) -154.813,-17.894 ; R3.1@-155.029,-18.416 ccw(c-155.551,-17.894) -154.813,-17.894 ; R3.1@-155.029,-18.416 ccw(c-155.551,-17.894) -154.813,-17.894 ; -154.813,-17.894 ccw(c-154.074,-17.894) R3.1@-154.596,-18.416 ; -154.813,-17.894 ccw(c-154.074,-17.894) R3.1@-154.596,-18.416 ; -154.813,-17.894 ccw(c-154.074,-17.894) R3.1@-154.596,-18.416 ; -154.813,-17.894 ccw(c-154.074,-17.894) R3.1@-154.596,-18.416 ; -154.813,-17.894 ccw(c-154.074,-17.894) R3.1@-154.596,-18.416
NetC9_2: C9.2 R9.2 | length 39.2
  Top Layer w0.15: v1(-130.1,-28.219) C9.2@-128.382,-28.219 ; R9.2@-129.267,-22.537 ccw(c-129.759,-22.045) -129.063,-22.045 ; R9.2@-129.063,-22.84 v1(-129.063,-21.6) ; -129.063,-22.347 ccw(c-128.644,-22.347) R9.2@-128.94,-22.643 ; -129.063,-21.985 ccw(c-128.282,-21.985) R9.2@-128.834,-22.537 ; v1@-129.976,-28.342 cw(c-129.678,-28.641) -129.678,-28.219 ; v1@-129.976,-28.342 cw(c-129.678,-28.641) -129.678,-28.219 ; v1@-129.976,-28.342 cw(c-129.678,-28.641) -129.678,-28.219 ; v1@-129.976,-28.342 cw(c-129.678,-28.641) -129.678,-28.219 ; v1@-129.976,-28.095 ccw(c-129.678,-27.796) -129.678,-28.219 ; v1@-129.976,-28.095 ccw(c-129.678,-27.796) -129.678,-28.219 ; v1@-129.976,-28.095 ccw(c-129.678,-27.796) -129.678,-28.219 ; v1@-129.976,-28.095 ccw(c-129.678,-27.796) -129.678,-28.219 ; -129.65,-28.219 cw(c-129.65,-29.486) C9.2@-128.754,-28.59 ; -129.65,-28.219 ccw(c-129.65,-26.951) C9.2@-128.754,-27.847 ; -129.65,-28.219 cw(c-129.65,-29.486) C9.2@-128.754,-28.59 ; -129.65,-28.219 ccw(c-129.65,-26.951) C9.2@-128.754,-27.847 ; -129.65,-28.219 cw(c-129.65,-29.486) C9.2@-128.754,-28.59 ; -129.65,-28.219 ccw(c-129.65,-26.951) C9.2@-128.754,-27.847 ; -129.65,-28.219 ccw(c-129.65,-26.951) C9.2@-128.754,-27.847 ; -129.65,-28.219 cw(c-129.65,-29.486) C9.2@-128.754,-28.59 ; -129.288,-28.219 cw(c-129.288,-29.124) C9.2@-128.648,-28.484 ; -129.288,-28.219 ccw(c-129.288,-27.313) C9.2@-128.648,-27.953 ; -129.288,-28.219 cw(c-129.288,-29.124) C9.2@-128.648,-28.484 ; -129.288,-28.219 ccw(c-129.288,-27.313) C9.2@-128.648,-27.953 ; -129.288,-28.219 cw(c-129.288,-29.124) C9.2@-128.648,-28.484 ; -129.288,-28.219 ccw(c-129.288,-27.313) C9.2@-128.648,-27.953 ; -129.288,-28.219 ccw(c-129.288,-27.313) C9.2@-128.648,-27.953 ; -129.288,-28.219 cw(c-129.288,-29.124) C9.2@-128.648,-28.484 ; R9.2@-129.28,-22.497 ccw(c-129.802,-21.975) -129.063,-21.975 ; R9.2@-129.28,-22.497 ccw(c-129.802,-21.975) -129.063,-21.975 ; R9.2@-129.28,-22.497 ccw(c-129.802,-21.975) -129.063,-21.975 ; v1@-129.187,-21.724 cw(c-129.486,-22.022) -129.063,-22.022 ; v1@-129.187,-21.724 cw(c-129.486,-22.022) -129.063,-22.022 ; v1@-129.187,-21.724 cw(c-129.486,-22.022) -129.063,-22.022 ; v1@-129.187,-21.724 cw(c-129.486,-22.022) -129.063,-22.022 ; -129.063,-22.022 cw(c-128.641,-22.022) v1@-128.94,-21.724 ; -129.063,-22.022 cw(c-128.641,-22.022) v1@-128.94,-21.724 ; -129.063,-22.022 cw(c-128.641,-22.022) v1@-128.94,-21.724 ; -129.063,-22.022 cw(c-128.641,-22.022) v1@-128.94,-21.724 ; -129.063,-21.975 ccw(c-128.325,-21.975) R9.2@-128.847,-22.497 ; -129.063,-21.975 ccw(c-128.325,-21.975) R9.2@-128.847,-22.497 ; -129.063,-21.975 ccw(c-128.325,-21.975) R9.2@-128.847,-22.497
  Bottom Layer w0.15: v1(-130.1,-28.219) -130.1,-25.9 -129.063,-24.863 v1(-129.063,-21.6) ; v1@-130.224,-28.095 ccw(c-130.522,-27.796) -130.1,-27.796 ; v1@-130.224,-28.095 ccw(c-130.522,-27.796) -130.1,-27.796 ; v1@-130.224,-28.095 ccw(c-130.522,-27.796) -130.1,-27.796 ; v1@-130.224,-28.095 ccw(c-130.522,-27.796) -130.1,-27.796 ; -130.1,-27.796 ccw(c-129.678,-27.796) v1@-129.976,-28.095 ; -130.1,-27.796 ccw(c-129.678,-27.796) v1@-129.976,-28.095 ; -130.1,-27.796 ccw(c-129.678,-27.796) v1@-129.976,-28.095 ; -130.1,-27.796 ccw(c-129.678,-27.796) v1@-129.976,-28.095 ; v1@-129.187,-21.724 cw(c-129.486,-22.022) -129.063,-22.022 ; v1@-129.187,-21.724 cw(c-129.486,-22.022) -129.063,-22.022 ; v1@-129.187,-21.724 cw(c-129.486,-22.022) -129.063,-22.022 ; v1@-129.187,-21.724 cw(c-129.486,-22.022) -129.063,-22.022 ; -129.063,-22.022 cw(c-128.641,-22.022) v1@-128.94,-21.724 ; -129.063,-22.022 cw(c-128.641,-22.022) v1@-128.94,-21.724 ; -129.063,-22.022 cw(c-128.641,-22.022) v1@-128.94,-21.724 ; -129.063,-22.022 cw(c-128.641,-22.022) v1@-128.94,-21.724
NetC10_2: C10.2 R10.2 | length 28.6
  Top Layer w0.15: R10.2@-125.563,-22.84 -123.66,-22.84 -123.1,-23.4 -123.1,-26.6 -122.683,-27.017 ; R10.2@-125.44,-22.991 cw(c-125.077,-23.355) -125.077,-22.84 ; R10.2@-125.334,-23.097 cw(c-124.715,-23.717) -124.715,-22.84 ; R10.2@-125.334,-22.664 ccw(c-124.91,-22.24) -124.91,-22.84 ; C10.2@-122.683,-28.219 -122.683,-27.017 ; R10.2@-125.347,-23.057 cw(c-124.825,-23.579) -124.825,-22.84 ; R10.2@-125.347,-23.057 cw(c-124.825,-23.579) -124.825,-22.84 ; R10.2@-125.347,-23.057 cw(c-124.825,-23.579) -124.825,-22.84 ; R10.2@-125.347,-23.057 cw(c-124.825,-23.579) -124.825,-22.84 ; R10.2@-125.347,-22.624 ccw(c-124.825,-22.102) -124.825,-22.84 ; R10.2@-125.347,-22.624 ccw(c-124.825,-22.102) -124.825,-22.84 ; R10.2@-125.347,-22.624 ccw(c-124.825,-22.102) -124.825,-22.84 ; R10.2@-125.347,-22.624 ccw(c-124.825,-22.102) -124.825,-22.84 ; C10.2@-123.027,-27.772 ccw(c-123.682,-27.018) -122.683,-27.018 ; C10.2@-123.027,-27.772 ccw(c-123.682,-27.018) -122.683,-27.018 ; C10.2@-123.027,-27.772 ccw(c-123.682,-27.018) -122.683,-27.018 ; C10.2@-123.027,-27.772 ccw(c-123.682,-27.018) -122.683,-27.018 ; C10.2@-123.027,-27.772 ccw(c-123.682,-27.018) -122.683,-27.018 ; C10.2@-122.928,-27.885 ccw(c-123.396,-27.346) -122.683,-27.346 ; C10.2@-122.928,-27.885 ccw(c-123.396,-27.346) -122.683,-27.346 ; C10.2@-122.928,-27.885 ccw(c-123.396,-27.346) -122.683,-27.346 ; C10.2@-122.928,-27.885 ccw(c-123.396,-27.346) -122.683,-27.346 ; C10.2@-122.928,-27.885 ccw(c-123.396,-27.346) -122.683,-27.346 ; -122.683,-27.346 ccw(c-121.969,-27.346) C10.2@-122.437,-27.885 ; -122.683,-27.346 ccw(c-121.969,-27.346) C10.2@-122.437,-27.885 ; -122.683,-27.346 ccw(c-121.969,-27.346) C10.2@-122.437,-27.885 ; -122.683,-27.346 ccw(c-121.969,-27.346) C10.2@-122.437,-27.885 ; -122.683,-27.346 ccw(c-121.969,-27.346) C10.2@-122.437,-27.885 ; -122.683,-27.018 ccw(c-121.683,-27.018) C10.2@-122.338,-27.772 ; -122.683,-27.018 ccw(c-121.683,-27.018) C10.2@-122.338,-27.772 ; -122.683,-27.018 ccw(c-121.683,-27.018) C10.2@-122.338,-27.772 ; -122.683,-27.018 ccw(c-121.683,-27.018) C10.2@-122.338,-27.772 ; -122.683,-27.018 ccw(c-121.683,-27.018) C10.2@-122.338,-27.772
NetC16_1: C16.1 R13.1 R18.1 | length 34.6
  Top Layer w0.15: C16.1@-155.64,-6.777 C16.1@-155.704,-6.714 -155.704,-7.796 ; R18.1@-155.387,-11.54 R13.1@-155.387,-9.44 -155.387,-8.113 -155.704,-7.796 ; C16.1@-156.013,-7.188 cw(c-156.457,-7.796) -155.704,-7.796 ; C16.1@-156.013,-7.188 cw(c-156.457,-7.796) -155.704,-7.796 ; C16.1@-156.013,-7.188 cw(c-156.457,-7.796) -155.704,-7.796 ; C16.1@-156.013,-7.188 cw(c-156.457,-7.796) -155.704,-7.796 ; C16.1@-156.013,-7.188 cw(c-156.457,-7.796) -155.704,-7.796 ; C16.1@-155.925,-7.066 cw(c-156.242,-7.501) -155.704,-7.501 ; C16.1@-155.925,-7.066 cw(c-156.242,-7.501) -155.704,-7.501 ; C16.1@-155.925,-7.066 cw(c-156.242,-7.501) -155.704,-7.501 ; C16.1@-155.925,-7.066 cw(c-156.242,-7.501) -155.704,-7.501 ; C16.1@-155.925,-7.066 cw(c-156.242,-7.501) -155.704,-7.501 ; -155.704,-7.796 cw(c-154.95,-7.796) C16.1@-155.394,-7.188 ; -155.704,-7.796 cw(c-154.95,-7.796) C16.1@-155.394,-7.188 ; -155.704,-7.796 cw(c-154.95,-7.796) C16.1@-155.394,-7.188 ; -155.704,-7.796 cw(c-154.95,-7.796) C16.1@-155.394,-7.188 ; -155.704,-7.796 cw(c-154.95,-7.796) C16.1@-155.394,-7.188 ; -155.704,-7.501 cw(c-155.165,-7.501) C16.1@-155.482,-7.066 ; -155.704,-7.501 cw(c-155.165,-7.501) C16.1@-155.482,-7.066 ; -155.704,-7.501 cw(c-155.165,-7.501) C16.1@-155.482,-7.066 ; -155.704,-7.501 cw(c-155.165,-7.501) C16.1@-155.482,-7.066 ; -155.704,-7.501 cw(c-155.165,-7.501) C16.1@-155.482,-7.066 ; R18.1@-155.604,-11.197 ccw(c-156.126,-10.675) -155.387,-10.675 ; R18.1@-155.604,-11.197 ccw(c-156.126,-10.675) -155.387,-10.675 ; R18.1@-155.604,-11.197 ccw(c-156.126,-10.675) -155.387,-10.675 ; R18.1@-155.604,-11.197 ccw(c-156.126,-10.675) -155.387,-10.675 ; R18.1@-155.604,-11.197 ccw(c-156.126,-10.675) -155.387,-10.675 ; R13.1@-155.604,-9.784 cw(c-156.126,-10.306) -155.387,-10.306 ; R13.1@-155.604,-9.784 cw(c-156.126,-10.306) -155.387,-10.306 ; R13.1@-155.604,-9.784 cw(c-156.126,-10.306) -155.387,-10.306 ; R13.1@-155.604,-9.784 cw(c-156.126,-10.306) -155.387,-10.306 ; R13.1@-155.604,-9.784 cw(c-156.126,-10.306) -155.387,-10.306 ; R13.1@-155.604,-9.097 ccw(c-156.126,-8.575) -155.387,-8.575 ; R13.1@-155.604,-9.097 ccw(c-156.126,-8.575) -155.387,-8.575 ; R13.1@-155.604,-9.097 ccw(c-156.126,-8.575) -155.387,-8.575 ; R13.1@-155.604,-9.097 ccw(c-156.126,-8.575) -155.387,-8.575 ; R13.1@-155.604,-9.097 ccw(c-156.126,-8.575) -155.387,-8.575 ; -155.387,-10.675 ccw(c-154.649,-10.675) R18.1@-155.171,-11.197 ; -155.387,-10.675 ccw(c-154.649,-10.675) R18.1@-155.171,-11.197 ; -155.387,-10.675 ccw(c-154.649,-10.675) R18.1@-155.171,-11.197 ; -155.387,-10.675 ccw(c-154.649,-10.675) R18.1@-155.171,-11.197 ; -155.387,-10.675 ccw(c-154.649,-10.675) R18.1@-155.171,-11.197 ; -155.387,-10.306 cw(c-154.649,-10.306) R13.1@-155.171,-9.784 ; -155.387,-10.306 cw(c-154.649,-10.306) R13.1@-155.171,-9.784 ; -155.387,-10.306 cw(c-154.649,-10.306) R13.1@-155.171,-9.784 ; -155.387,-10.306 cw(c-154.649,-10.306) R13.1@-155.171,-9.784 ; -155.387,-10.306 cw(c-154.649,-10.306) R13.1@-155.171,-9.784 ; -155.387,-8.575 ccw(c-154.649,-8.575) R13.1@-155.171,-9.097 ; -155.387,-8.575 ccw(c-154.649,-8.575) R13.1@-155.171,-9.097 ; -155.387,-8.575 ccw(c-154.649,-8.575) R13.1@-155.171,-9.097 ; -155.387,-8.575 ccw(c-154.649,-8.575) R13.1@-155.171,-9.097 ; -155.387,-8.575 ccw(c-154.649,-8.575) R13.1@-155.171,-9.097
NetC17_2: C17.2 R24.2 Y1.1 | length 83.4
  Top Layer w0.15: R24.2@-32.663,-77.109 -28.215,-77.109 Y1.1@-28.208,-77.103 C17.2@-23.614,-77.103 ; R24.2@-32.447,-77.326 cw(c-31.925,-77.848) -31.925,-77.109 ; R24.2@-32.447,-77.326 cw(c-31.925,-77.848) -31.925,-77.109 ; R24.2@-32.447,-77.326 cw(c-31.925,-77.848) -31.925,-77.109 ; R24.2@-32.447,-77.326 cw(c-31.925,-77.848) -31.925,-77.109 ; R24.2@-32.447,-77.326 cw(c-31.925,-77.848) -31.925,-77.109 ; R24.2@-32.447,-76.893 ccw(c-31.925,-76.371) -31.925,-77.109 ; R24.2@-32.447,-76.893 ccw(c-31.925,-76.371) -31.925,-77.109 ; R24.2@-32.447,-76.893 ccw(c-31.925,-76.371) -31.925,-77.109 ; R24.2@-32.447,-76.893 ccw(c-31.925,-76.371) -31.925,-77.109 ; R24.2@-32.447,-76.893 ccw(c-31.925,-76.371) -31.925,-77.109 ; -29.883,-77.109 ccw(c-29.883,-75.428) Y1.1@-28.694,-76.617 ; -29.883,-77.109 ccw(c-29.883,-75.428) Y1.1@-28.694,-76.617 ; -29.883,-77.109 ccw(c-29.883,-75.428) Y1.1@-28.694,-76.617 ; -29.883,-77.109 ccw(c-29.883,-75.428) Y1.1@-28.694,-76.617 ; -29.883,-77.109 ccw(c-29.883,-75.428) Y1.1@-28.694,-76.617 ; -29.85,-77.109 cw(c-29.85,-78.745) Y1.1@-28.694,-77.588 ; -29.85,-77.109 cw(c-29.85,-78.745) Y1.1@-28.694,-77.588 ; -29.85,-77.109 cw(c-29.85,-78.745) Y1.1@-28.694,-77.588 ; -29.85,-77.109 cw(c-29.85,-78.745) Y1.1@-28.694,-77.588 ; -29.85,-77.109 cw(c-29.85,-78.745) Y1.1@-28.694,-77.588 ; -29.521,-77.109 ccw(c-29.521,-75.79) Y1.1@-28.588,-76.723 ; -29.521,-77.109 ccw(c-29.521,-75.79) Y1.1@-28.588,-76.723 ; -29.521,-77.109 ccw(c-29.521,-75.79) Y1.1@-28.588,-76.723 ; -29.521,-77.109 ccw(c-29.521,-75.79) Y1.1@-28.588,-76.723 ; -29.521,-77.109 ccw(c-29.521,-75.79) Y1.1@-28.588,-76.723 ; -29.488,-77.109 cw(c-29.488,-78.383) Y1.1@-28.588,-77.482 ; -29.488,-77.109 cw(c-29.488,-78.383) Y1.1@-28.588,-77.482 ; -29.488,-77.109 cw(c-29.488,-78.383) Y1.1@-28.588,-77.482 ; -29.488,-77.109 cw(c-29.488,-78.383) Y1.1@-28.588,-77.482 ; -29.488,-77.109 cw(c-29.488,-78.383) Y1.1@-28.588,-77.482 ; -29.159,-77.109 ccw(c-29.159,-76.152) Y1.1@-28.482,-76.829 ; -29.159,-77.109 ccw(c-29.159,-76.152) Y1.1@-28.482,-76.829 ; -29.159,-77.109 ccw(c-29.159,-76.152) Y1.1@-28.482,-76.829 ; -29.159,-77.109 ccw(c-29.159,-76.152) Y1.1@-28.482,-76.829 ; -29.159,-77.109 ccw(c-29.159,-76.152) Y1.1@-28.482,-76.829 ; -29.126,-77.109 cw(c-29.126,-78.02) Y1.1@-28.482,-77.376 ; -29.126,-77.109 cw(c-29.126,-78.02) Y1.1@-28.482,-77.376 ; -29.126,-77.109 cw(c-29.126,-78.02) Y1.1@-28.482,-77.376 ; -29.126,-77.109 cw(c-29.126,-78.02) Y1.1@-28.482,-77.376 ; -29.126,-77.109 cw(c-29.126,-78.02) Y1.1@-28.482,-77.376 ; Y1.1@-27.935,-77.376 cw(c-27.274,-78.037) -27.274,-77.103 ; Y1.1@-27.935,-77.376 cw(c-27.274,-78.037) -27.274,-77.103 ; Y1.1@-27.935,-77.376 cw(c-27.274,-78.037) -27.274,-77.103 ; Y1.1@-27.935,-77.376 cw(c-27.274,-78.037) -27.274,-77.103 ; Y1.1@-27.935,-77.376 cw(c-27.274,-78.037) -27.274,-77.103 ; Y1.1@-27.935,-76.829 ccw(c-27.274,-76.168) -27.274,-77.103 ; Y1.1@-27.935,-76.829 ccw(c-27.274,-76.168) -27.274,-77.103 ; Y1.1@-27.935,-76.829 ccw(c-27.274,-76.168) -27.274,-77.103 ; Y1.1@-27.935,-76.829 ccw(c-27.274,-76.168) -27.274,-77.103 ; Y1.1@-27.935,-76.829 ccw(c-27.274,-76.168) -27.274,-77.103 ; Y1.1@-27.828,-77.482 cw(c-26.912,-78.399) -26.912,-77.103 ; Y1.1@-27.828,-77.482 cw(c-26.912,-78.399) -26.912,-77.103 ; Y1.1@-27.828,-77.482 cw(c-26.912,-78.399) -26.912,-77.103 ; Y1.1@-27.828,-77.482 cw(c-26.912,-78.399) -26.912,-77.103 ; Y1.1@-27.828,-77.482 cw(c-26.912,-78.399) -26.912,-77.103 ; Y1.1@-27.828,-76.723 ccw(c-26.912,-75.806) -26.912,-77.103 ; Y1.1@-27.828,-76.723 ccw(c-26.912,-75.806) -26.912,-77.103 ; Y1.1@-27.828,-76.723 ccw(c-26.912,-75.806) -26.912,-77.103 ; Y1.1@-27.828,-76.723 ccw(c-26.912,-75.806) -26.912,-77.103 ; Y1.1@-27.828,-76.723 ccw(c-26.912,-75.806) -26.912,-77.103 ; Y1.1@-27.722,-77.588 cw(c-26.55,-78.761) -26.55,-77.103 ; Y1.1@-27.722,-77.588 cw(c-26.55,-78.761) -26.55,-77.103 ; Y1.1@-27.722,-77.588 cw(c-26.55,-78.761) -26.55,-77.103 ; Y1.1@-27.722,-77.588 cw(c-26.55,-78.761) -26.55,-77.103 ; Y1.1@-27.722,-77.588 cw(c-26.55,-78.761) -26.55,-77.103 ; Y1.1@-27.722,-76.617 ccw(c-26.55,-75.444) -26.55,-77.103 ; Y1.1@-27.722,-76.617 ccw(c-26.55,-75.444) -26.55,-77.103 ; Y1.1@-27.722,-76.617 ccw(c-26.55,-75.444) -26.55,-77.103 ; Y1.1@-27.722,-76.617 ccw(c-26.55,-75.444) -26.55,-77.103 ; Y1.1@-27.722,-76.617 ccw(c-26.55,-75.444) -26.55,-77.103 ; -24.387,-77.103 cw(c-24.387,-77.889) C17.2@-23.831,-77.333 ; -24.387,-77.103 cw(c-24.387,-77.889) C17.2@-23.831,-77.333 ; -24.387,-77.103 cw(c-24.387,-77.889) C17.2@-23.831,-77.333 ; -24.387,-77.103 cw(c-24.387,-77.889) C17.2@-23.831,-77.333 ; -24.387,-77.103 cw(c-24.387,-77.889) C17.2@-23.831,-77.333 ; -24.319,-77.103 ccw(c-24.319,-76.412) C17.2@-23.831,-76.9 ; -24.319,-77.103 ccw(c-24.319,-76.412) C17.2@-23.831,-76.9 ; -24.319,-77.103 ccw(c-24.319,-76.412) C17.2@-23.831,-76.9 ; -24.319,-77.103 ccw(c-24.319,-76.412) C17.2@-23.831,-76.9 ; -24.319,-77.103 ccw(c-24.319,-76.412) C17.2@-23.831,-76.9 ; -24.025,-77.103 cw(c-24.025,-77.527) C17.2@-23.724,-77.227 ; -24.025,-77.103 cw(c-24.025,-77.527) C17.2@-23.724,-77.227 ; -24.025,-77.103 cw(c-24.025,-77.527) C17.2@-23.724,-77.227 ; -24.025,-77.103 cw(c-24.025,-77.527) C17.2@-23.724,-77.227 ; -24.025,-77.103 cw(c-24.025,-77.527) C17.2@-23.724,-77.227
NetC18_2: C18.2 R33.2 Y1.2 | length 83.6
  Top Layer w0.15: R33.2@-32.663,-72.109 -28.219,-72.109 Y1.2@-28.208,-72.099 C18.2@-23.514,-72.099 ; R33.2@-32.447,-72.326 cw(c-31.925,-72.848) -31.925,-72.109 ; R33.2@-32.447,-72.326 cw(c-31.925,-72.848) -31.925,-72.109 ; R33.2@-32.447,-72.326 cw(c-31.925,-72.848) -31.925,-72.109 ; R33.2@-32.447,-72.326 cw(c-31.925,-72.848) -31.925,-72.109 ; R33.2@-32.447,-72.326 cw(c-31.925,-72.848) -31.925,-72.109 ; R33.2@-32.447,-71.893 ccw(c-31.925,-71.371) -31.925,-72.109 ; R33.2@-32.447,-71.893 ccw(c-31.925,-71.371) -31.925,-72.109 ; R33.2@-32.447,-71.893 ccw(c-31.925,-71.371) -31.925,-72.109 ; R33.2@-32.447,-71.893 ccw(c-31.925,-71.371) -31.925,-72.109 ; R33.2@-32.447,-71.893 ccw(c-31.925,-71.371) -31.925,-72.109 ; -29.892,-72.109 ccw(c-29.892,-70.415) Y1.2@-28.694,-71.613 ; -29.892,-72.109 ccw(c-29.892,-70.415) Y1.2@-28.694,-71.613 ; -29.892,-72.109 ccw(c-29.892,-70.415) Y1.2@-28.694,-71.613 ; -29.892,-72.109 ccw(c-29.892,-70.415) Y1.2@-28.694,-71.613 ; -29.892,-72.109 ccw(c-29.892,-70.415) Y1.2@-28.694,-71.613 ; -29.841,-72.109 cw(c-29.841,-73.732) Y1.2@-28.694,-72.585 ; -29.841,-72.109 cw(c-29.841,-73.732) Y1.2@-28.694,-72.585 ; -29.841,-72.109 cw(c-29.841,-73.732) Y1.2@-28.694,-72.585 ; -29.841,-72.109 cw(c-29.841,-73.732) Y1.2@-28.694,-72.585 ; -29.841,-72.109 cw(c-29.841,-73.732) Y1.2@-28.694,-72.585 ; -29.53,-72.109 ccw(c-29.53,-70.777) Y1.2@-28.588,-71.719 ; -29.53,-72.109 ccw(c-29.53,-70.777) Y1.2@-28.588,-71.719 ; -29.53,-72.109 ccw(c-29.53,-70.777) Y1.2@-28.588,-71.719 ; -29.53,-72.109 ccw(c-29.53,-70.777) Y1.2@-28.588,-71.719 ; -29.53,-72.109 ccw(c-29.53,-70.777) Y1.2@-28.588,-71.719 ; -29.479,-72.109 cw(c-29.479,-73.37) Y1.2@-28.588,-72.479 ; -29.479,-72.109 cw(c-29.479,-73.37) Y1.2@-28.588,-72.479 ; -29.479,-72.109 cw(c-29.479,-73.37) Y1.2@-28.588,-72.479 ; -29.479,-72.109 cw(c-29.479,-73.37) Y1.2@-28.588,-72.479 ; -29.479,-72.109 cw(c-29.479,-73.37) Y1.2@-28.588,-72.479 ; -29.168,-72.109 ccw(c-29.168,-71.139) Y1.2@-28.482,-71.825 ; -29.168,-72.109 ccw(c-29.168,-71.139) Y1.2@-28.482,-71.825 ; -29.168,-72.109 ccw(c-29.168,-71.139) Y1.2@-28.482,-71.825 ; -29.168,-72.109 ccw(c-29.168,-71.139) Y1.2@-28.482,-71.825 ; -29.168,-72.109 ccw(c-29.168,-71.139) Y1.2@-28.482,-71.825 ; -29.117,-72.109 cw(c-29.117,-73.008) Y1.2@-28.482,-72.372 ; -29.117,-72.109 cw(c-29.117,-73.008) Y1.2@-28.482,-72.372 ; -29.117,-72.109 cw(c-29.117,-73.008) Y1.2@-28.482,-72.372 ; -29.117,-72.109 cw(c-29.117,-73.008) Y1.2@-28.482,-72.372 ; -29.117,-72.109 cw(c-29.117,-73.008) Y1.2@-28.482,-72.372 ; Y1.2@-27.935,-72.372 cw(c-27.274,-73.033) -27.274,-72.099 ; Y1.2@-27.935,-72.372 cw(c-27.274,-73.033) -27.274,-72.099 ; Y1.2@-27.935,-72.372 cw(c-27.274,-73.033) -27.274,-72.099 ; Y1.2@-27.935,-72.372 cw(c-27.274,-73.033) -27.274,-72.099 ; Y1.2@-27.935,-72.372 cw(c-27.274,-73.033) -27.274,-72.099 ; Y1.2@-27.935,-71.825 ccw(c-27.274,-71.164) -27.274,-72.099 ; Y1.2@-27.935,-71.825 ccw(c-27.274,-71.164) -27.274,-72.099 ; Y1.2@-27.935,-71.825 ccw(c-27.274,-71.164) -27.274,-72.099 ; Y1.2@-27.935,-71.825 ccw(c-27.274,-71.164) -27.274,-72.099 ; Y1.2@-27.935,-71.825 ccw(c-27.274,-71.164) -27.274,-72.099 ; Y1.2@-27.828,-72.479 cw(c-26.912,-73.395) -26.912,-72.099 ; Y1.2@-27.828,-72.479 cw(c-26.912,-73.395) -26.912,-72.099 ; Y1.2@-27.828,-72.479 cw(c-26.912,-73.395) -26.912,-72.099 ; Y1.2@-27.828,-72.479 cw(c-26.912,-73.395) -26.912,-72.099 ; Y1.2@-27.828,-72.479 cw(c-26.912,-73.395) -26.912,-72.099 ; Y1.2@-27.828,-71.719 ccw(c-26.912,-70.802) -26.912,-72.099 ; Y1.2@-27.828,-71.719 ccw(c-26.912,-70.802) -26.912,-72.099 ; Y1.2@-27.828,-71.719 ccw(c-26.912,-70.802) -26.912,-72.099 ; Y1.2@-27.828,-71.719 ccw(c-26.912,-70.802) -26.912,-72.099 ; Y1.2@-27.828,-71.719 ccw(c-26.912,-70.802) -26.912,-72.099 ; Y1.2@-27.722,-72.585 cw(c-26.55,-73.757) -26.55,-72.099 ; Y1.2@-27.722,-72.585 cw(c-26.55,-73.757) -26.55,-72.099 ; Y1.2@-27.722,-72.585 cw(c-26.55,-73.757) -26.55,-72.099 ; Y1.2@-27.722,-72.585 cw(c-26.55,-73.757) -26.55,-72.099 ; Y1.2@-27.722,-72.585 cw(c-26.55,-73.757) -26.55,-72.099 ; Y1.2@-27.722,-71.613 ccw(c-26.55,-70.44) -26.55,-72.099 ; Y1.2@-27.722,-71.613 ccw(c-26.55,-70.44) -26.55,-72.099 ; Y1.2@-27.722,-71.613 ccw(c-26.55,-70.44) -26.55,-72.099 ; Y1.2@-27.722,-71.613 ccw(c-26.55,-70.44) -26.55,-72.099 ; Y1.2@-27.722,-71.613 ccw(c-26.55,-70.44) -26.55,-72.099 ; -24.296,-72.099 cw(c-24.296,-72.898) C18.2@-23.731,-72.333 ; -24.296,-72.099 cw(c-24.296,-72.898) C18.2@-23.731,-72.333 ; -24.296,-72.099 cw(c-24.296,-72.898) C18.2@-23.731,-72.333 ; -24.296,-72.099 cw(c-24.296,-72.898) C18.2@-23.731,-72.333 ; -24.296,-72.099 cw(c-24.296,-72.898) C18.2@-23.731,-72.333 ; -24.21,-72.099 ccw(c-24.21,-71.421) C18.2@-23.731,-71.9 ; -24.21,-72.099 ccw(c-24.21,-71.421) C18.2@-23.731,-71.9 ; -24.21,-72.099 ccw(c-24.21,-71.421) C18.2@-23.731,-71.9 ; -24.21,-72.099 ccw(c-24.21,-71.421) C18.2@-23.731,-71.9 ; -24.21,-72.099 ccw(c-24.21,-71.421) C18.2@-23.731,-71.9 ; -23.934,-72.099 cw(c-23.934,-72.536) C18.2@-23.624,-72.227 ; -23.934,-72.099 cw(c-23.934,-72.536) C18.2@-23.624,-72.227 ; -23.934,-72.099 cw(c-23.934,-72.536) C18.2@-23.624,-72.227 ; -23.934,-72.099 cw(c-23.934,-72.536) C18.2@-23.624,-72.227 ; -23.934,-72.099 cw(c-23.934,-72.536) C18.2@-23.624,-72.227
NetC19_2: C19.2 R47.1 U3.12 | length 30.2
  Top Layer w0.15: C19.2@-45.414,-84.717 -45.387,-84.69 R47.1@-45.387,-82.54 -45.387,-81.187 -44.9,-80.7 -44,-80.7 -43.6,-80.3 -43.6,-78.6 -43.95,-78.25 U3.12@-45.35,-78.25 ; U3.12@-44.751,-78.314 cw(c-44.598,-78.467) -44.598,-78.25 cw(c-44.598,-78.033) U3.12@-44.751,-78.186 ; U3.12@-44.746,-78.314 cw(c-44.593,-78.467) -44.593,-78.25 cw(c-44.593,-78.033) U3.12@-44.746,-78.186 ; C19.2@-45.631,-84.373 ccw(c-46.218,-83.786) -45.387,-83.786 ; C19.2@-45.631,-84.373 ccw(c-46.218,-83.786) -45.387,-83.786 ; C19.2@-45.631,-84.373 ccw(c-46.218,-83.786) -45.387,-83.786 ; C19.2@-45.631,-84.373 ccw(c-46.218,-83.786) -45.387,-83.786 ; C19.2@-45.631,-84.373 ccw(c-46.218,-83.786) -45.387,-83.786 ; R47.1@-45.604,-82.884 cw(c-46.126,-83.406) -45.387,-83.406 ; R47.1@-45.604,-82.884 cw(c-46.126,-83.406) -45.387,-83.406 ; R47.1@-45.604,-82.884 cw(c-46.126,-83.406) -45.387,-83.406 ; R47.1@-45.604,-82.884 cw(c-46.126,-83.406) -45.387,-83.406 ; R47.1@-45.604,-82.884 cw(c-46.126,-83.406) -45.387,-83.406 ; R47.1@-45.604,-82.197 ccw(c-46.126,-81.675) -45.387,-81.675 ; R47.1@-45.604,-82.197 ccw(c-46.126,-81.675) -45.387,-81.675 ; R47.1@-45.604,-82.197 ccw(c-46.126,-81.675) -45.387,-81.675 ; R47.1@-45.604,-82.197 ccw(c-46.126,-81.675) -45.387,-81.675 ; R47.1@-45.604,-82.197 ccw(c-46.126,-81.675) -45.387,-81.675 ; C19.2@-45.524,-84.479 ccw(c-45.855,-84.148) -45.387,-84.148 ; C19.2@-45.524,-84.479 ccw(c-45.855,-84.148) -45.387,-84.148 ; C19.2@-45.524,-84.479 ccw(c-45.855,-84.148) -45.387,-84.148 ; C19.2@-45.524,-84.479 ccw(c-45.855,-84.148) -45.387,-84.148 ; C19.2@-45.524,-84.479 ccw(c-45.855,-84.148) -45.387,-84.148 ; -45.387,-83.915 ccw(c-44.74,-83.915) C19.2@-45.198,-84.373 ; -45.387,-83.915 ccw(c-44.74,-83.915) C19.2@-45.198,-84.373 ; -45.387,-83.915 ccw(c-44.74,-83.915) C19.2@-45.198,-84.373 ; -45.387,-83.915 ccw(c-44.74,-83.915) C19.2@-45.198,-84.373 ; -45.387,-83.915 ccw(c-44.74,-83.915) C19.2@-45.198,-84.373 ; -45.387,-83.406 cw(c-44.649,-83.406) R47.1@-45.171,-82.884 ; -45.387,-83.406 cw(c-44.649,-83.406) R47.1@-45.171,-82.884 ; -45.387,-83.406 cw(c-44.649,-83.406) R47.1@-45.171,-82.884 ; -45.387,-83.406 cw(c-44.649,-83.406) R47.1@-45.171,-82.884 ; -45.387,-83.406 cw(c-44.649,-83.406) R47.1@-45.171,-82.884 ; -45.387,-81.675 ccw(c-44.649,-81.675) R47.1@-45.171,-82.197 ; -45.387,-81.675 ccw(c-44.649,-81.675) R47.1@-45.171,-82.197 ; -45.387,-81.675 ccw(c-44.649,-81.675) R47.1@-45.171,-82.197 ; -45.387,-81.675 ccw(c-44.649,-81.675) R47.1@-45.171,-82.197 ; -45.387,-81.675 ccw(c-44.649,-81.675) R47.1@-45.171,-82.197 ; U3.12@-44.801,-78.314 cw(c-44.648,-78.467) -44.648,-78.25 ; U3.12@-44.801,-78.314 cw(c-44.648,-78.467) -44.648,-78.25 ; U3.12@-44.801,-78.314 cw(c-44.648,-78.467) -44.648,-78.25 ; U3.12@-44.801,-78.186 ccw(c-44.648,-78.033) -44.648,-78.25 ; U3.12@-44.801,-78.186 ccw(c-44.648,-78.033) -44.648,-78.25 ; U3.12@-44.801,-78.186 ccw(c-44.648,-78.033) -44.648,-78.25
NetC20_1: C20.1 LAN1.3 | length 29.3
  Top Layer w0.15: LAN1.3@-120.078,-16.844 -120.078,-15.678 ; C20.1@-110.617,-17.81 -112.79,-17.81 -115.2,-15.4 -119.8,-15.4 -120.078,-15.678 ; LAN1.3@-120.403,-16.21 ccw(c-120.676,-15.678) -120.078,-15.678 ; LAN1.3@-120.403,-16.21 ccw(c-120.676,-15.678) -120.078,-15.678 ; LAN1.3@-120.403,-16.21 ccw(c-120.676,-15.678) -120.078,-15.678 ; LAN1.3@-120.403,-16.21 ccw(c-120.676,-15.678) -120.078,-15.678 ; LAN1.3@-120.403,-16.21 ccw(c-120.676,-15.678) -120.078,-15.678 ; LAN1.3@-120.335,-16.343 ccw(c-120.55,-15.924) -120.078,-15.924 ; LAN1.3@-120.335,-16.343 ccw(c-120.55,-15.924) -120.078,-15.924 ; LAN1.3@-120.335,-16.343 ccw(c-120.55,-15.924) -120.078,-15.924 ; LAN1.3@-120.335,-16.343 ccw(c-120.55,-15.924) -120.078,-15.924 ; LAN1.3@-120.335,-16.343 ccw(c-120.55,-15.924) -120.078,-15.924 ; -120.078,-15.924 ccw(c-119.606,-15.924) LAN1.3@-119.821,-16.343 ; -120.078,-15.924 ccw(c-119.606,-15.924) LAN1.3@-119.821,-16.343 ; -120.078,-15.924 ccw(c-119.606,-15.924) LAN1.3@-119.821,-16.343 ; -120.078,-15.924 ccw(c-119.606,-15.924) LAN1.3@-119.821,-16.343 ; -120.078,-15.924 ccw(c-119.606,-15.924) LAN1.3@-119.821,-16.343 ; -120.078,-15.678 ccw(c-119.48,-15.678) LAN1.3@-119.753,-16.21 ; -120.078,-15.678 ccw(c-119.48,-15.678) LAN1.3@-119.753,-16.21 ; -120.078,-15.678 ccw(c-119.48,-15.678) LAN1.3@-119.753,-16.21 ; -120.078,-15.678 ccw(c-119.48,-15.678) LAN1.3@-119.753,-16.21 ; -120.078,-15.678 ccw(c-119.48,-15.678) LAN1.3@-119.753,-16.21 ; -111.482,-17.81 cw(c-111.482,-18.549) C20.1@-110.96,-18.026 ; -111.482,-17.81 ccw(c-111.482,-17.071) C20.1@-110.96,-17.593 ; -111.482,-17.81 cw(c-111.482,-18.549) C20.1@-110.96,-18.026 ; -111.482,-17.81 ccw(c-111.482,-17.071) C20.1@-110.96,-17.593 ; -111.482,-17.81 cw(c-111.482,-18.549) C20.1@-110.96,-18.026 ; -111.482,-17.81 ccw(c-111.482,-17.071) C20.1@-110.96,-17.593 ; -111.482,-17.81 cw(c-111.482,-18.549) C20.1@-110.96,-18.026 ; -111.482,-17.81 ccw(c-111.482,-17.071) C20.1@-110.96,-17.593 ; -111.482,-17.81 ccw(c-111.482,-17.071) C20.1@-110.96,-17.593 ; -111.482,-17.81 cw(c-111.482,-18.549) C20.1@-110.96,-18.026
NetC21_1: C21.1 LAN1.6 | length 14
  Top Layer w0.15: LAN1.6@-123.888,-19.384 -123.072,-20.2 -122.7,-20.2 -122.1,-20.8 -119.577,-20.8 -117.794,-22.583 C21.1@-117.01,-22.583 ; -117.749,-22.583 cw(c-117.749,-23.322) C21.1@-117.226,-22.8 ; -117.749,-22.583 ccw(c-117.749,-21.845) C21.1@-117.226,-22.367 ; -117.749,-22.583 cw(c-117.749,-23.322) C21.1@-117.226,-22.8 ; -117.749,-22.583 ccw(c-117.749,-21.845) C21.1@-117.226,-22.367 ; -117.749,-22.583 cw(c-117.749,-23.322) C21.1@-117.226,-22.8 ; -117.749,-22.583 ccw(c-117.749,-21.845) C21.1@-117.226,-22.367 ; -117.749,-22.583 cw(c-117.749,-23.322) C21.1@-117.226,-22.8 ; -117.749,-22.583 ccw(c-117.749,-21.845) C21.1@-117.226,-22.367 ; -117.749,-22.583 ccw(c-117.749,-21.845) C21.1@-117.226,-22.367 ; -117.749,-22.583 cw(c-117.749,-23.322) C21.1@-117.226,-22.8